# Altium PCB PCB1.PcbDoc
Units mil, origin at the board's own origin, x right, y up, seen from the top; angles counter-clockwise.
Board outline 6000 x 4000 mil, 2 copper layers (Top Layer, Bottom Layer); 40 components, 29 nets, 158 pads, 0 vias.
Unrouted connection lines stored in the file: 87.
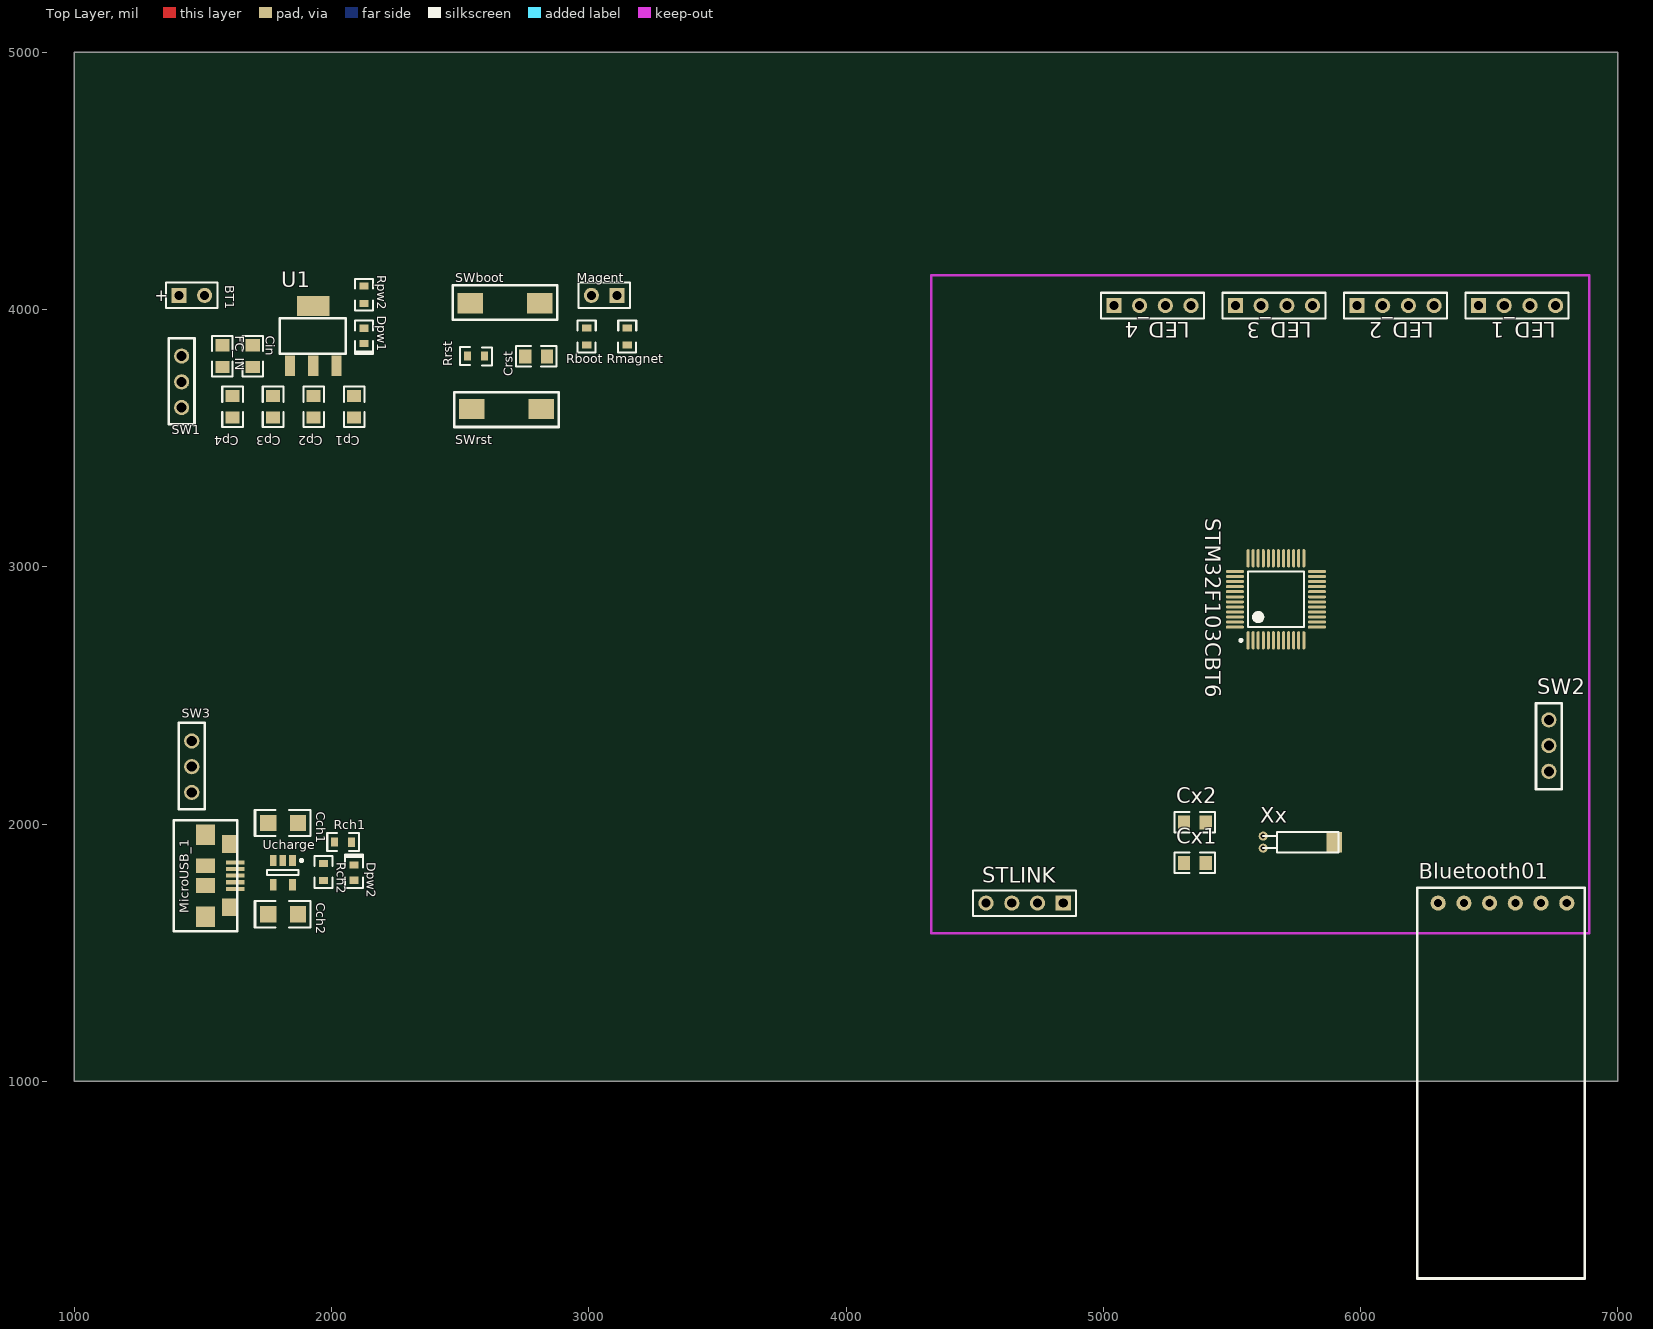
[diagram p0: Top Layer view]
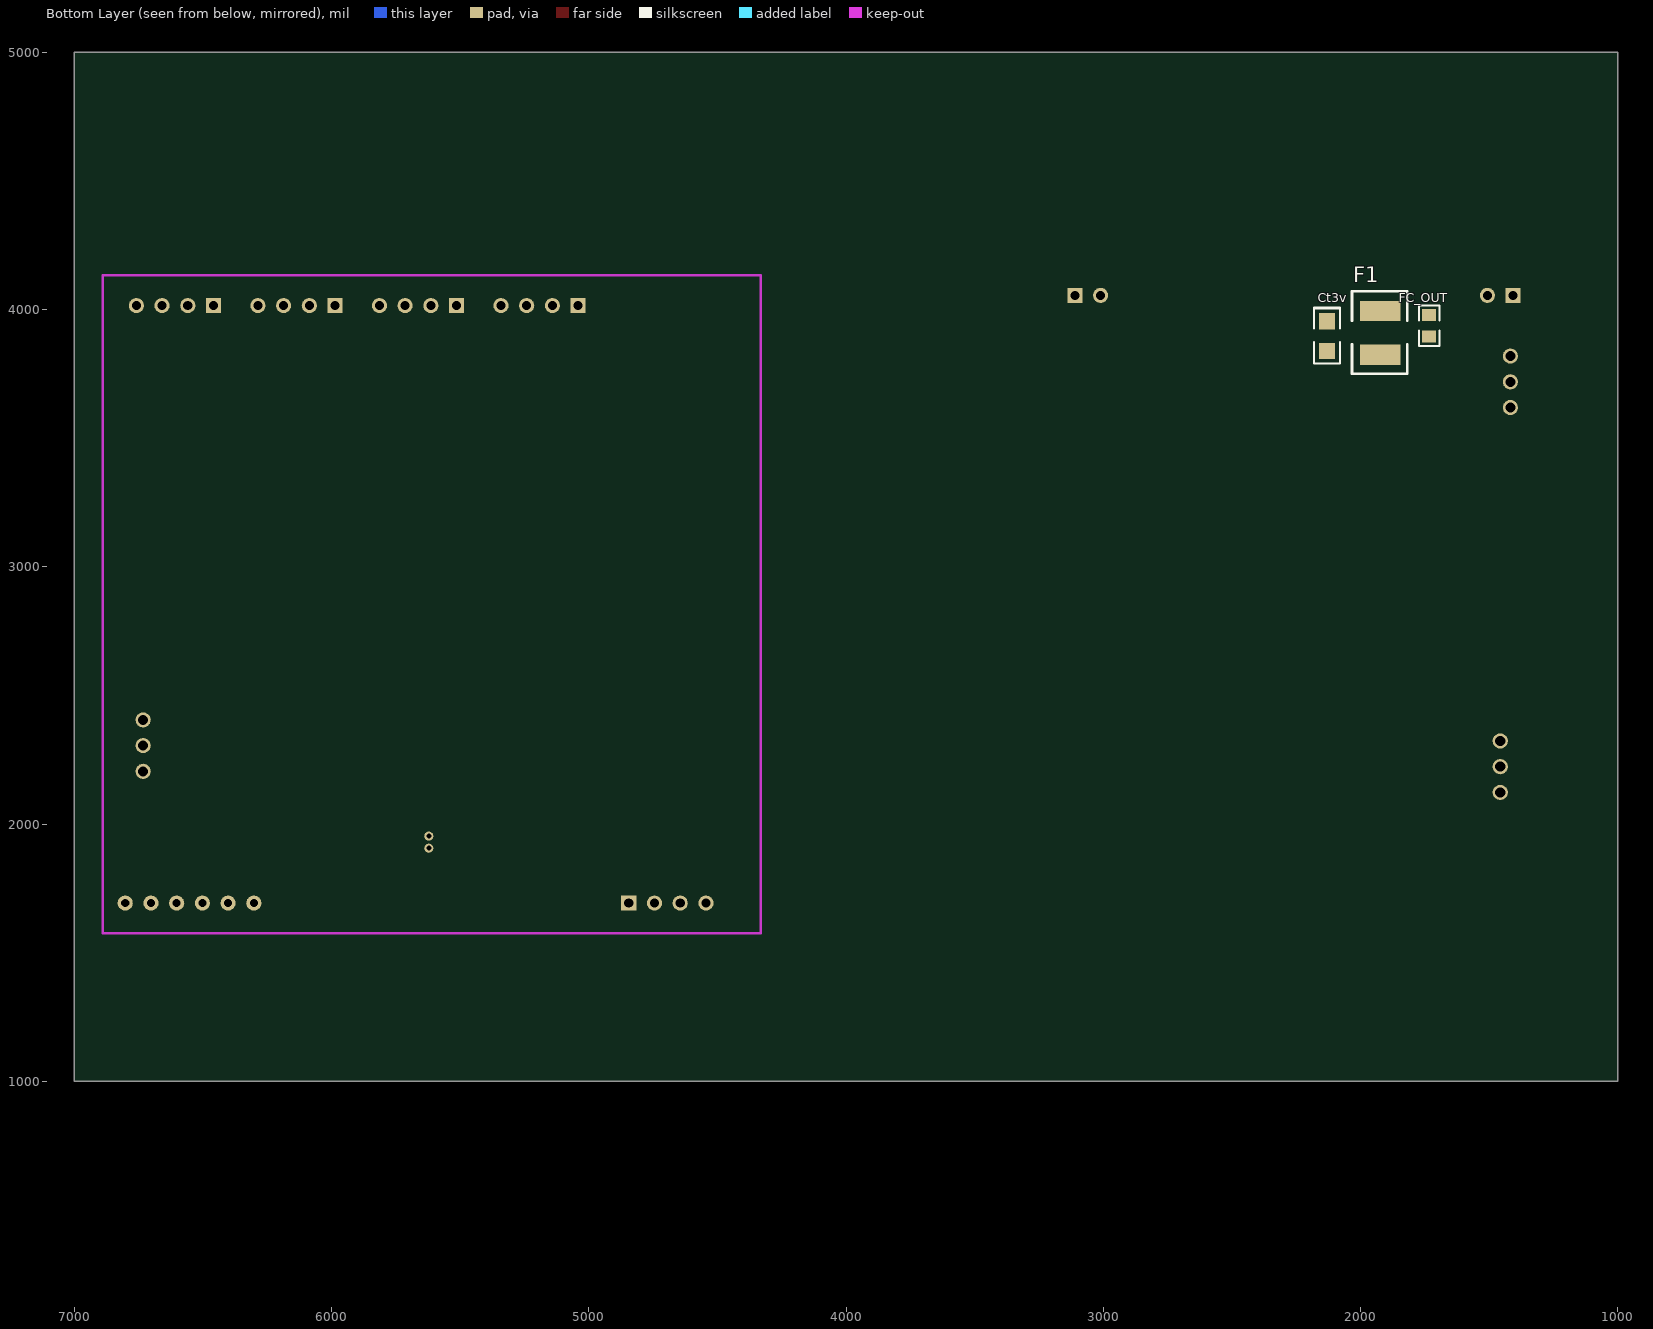
[diagram p1: Bottom Layer view, seen from below]

## Layer stack, top to bottom
Top Layer: signal copper 1.4
Dielectric: dielectric 12.6, FR-4, Dk 4.8
Bottom Layer: signal copper 1.4

## Board outline
1000,1000 7000,1000 7000,5000 1000,5000

## Design rules (kind name [scope] priority, off if disabled: settings)
Clearance [All] p1: gap=10
PolygonConnect [All] p1: connectstyle=Relief reliefconductorwidth=10 reliefentries=4 polygonreliefangle="90 Angle" airgapwidth=10
RoomDefinition LEDProject [InComponentClass('LEDProject')] p1: confinementstyle=ConfineIn formatcopy=TRUE lockcomponents=FALSE outline 1619.55,4924.44 13589.55,4924.44 13589.55,6564.44 1619.55,6564.44
RoutingVias [All] p1: holewidth=28 width=50 viastyle="Through Hole" minholewidth=28 minwidth=50 maxholewidth=28 maxwidth=50
SolderMaskExpansion [All] p1: expansion=4
Width [All] p1: maxlimit=10 minlimit=10 preferedwidth=10
28 further rules are at their usual default settings.

## Components (designator, comment, footprint, x,y, rotation, side; value= is the part's Value field where it differs from the comment)
Bluetooth01 "Bluetooth" "Bluetooth Module" 6813.08,1692.36 r180 top
BT1 "Battery" BAT-2 1456.69,4055.12 r0 top
Cch1 "CAP2" "Tantalum Cap Size A" 1811.02,2007.87 r90 top
Cch2 "CAP2" "Tantalum Cap Size A" 1811.02,1653.54 r90 top
Cin "CAP1" SMD-C-0805 1692.91,3818.9 r180 top
Cp1 "CAP1" SMD-C-0805 2086.61,3622.05 r180 top
Cp2 "CAP1" SMD-C-0805 1929.13,3622.05 r180 top
Cp3 "CAP1" SMD-C-0805 1771.65,3622.05 r180 top
Cp4 "CAP1" SMD-C-0805 1614.17,3622.05 r180 top
Crst "CAP1" SMD-C-0805 2795.28,3818.9 r90 top
Ct3v "CAP2" "Tantalum Cap Size A" 2125.98,3897.64 r180 bottom
Cx1 "CAP1" SMD-C-0805 5356.39,1849.84 r90 top
Cx2 "CAP1" SMD-C-0805 5356.39,2007.32 r90 top
Dpw1 "SMD LED" "SMT LED 0603" 2125.98,3897.64 r0 top
Dpw2 "SMD LED" "SMT LED 0603" 2086.61,1811.02 r180 top
F1 "fuse" FUSE_SMD 2007.87,3779.53 r90 bottom
FC_IN "CAP1" SMD-C-0805 1574.8,3818.9 r180 top
FC_OUT "CAP1" SMD-C-0805 1732.28,3937.01 r180 bottom
LED_1 "Header 4" HDR1X4 6458.75,4015.19 r0 top
LED_2 "Header 4" HDR1X4 5986.31,4015.19 r0 top
LED_3 "Header 4" HDR1X4 5513.87,4015.19 r0 top
LED_4 "Header 5" HDR1X4 5041.43,4015.19 r0 top
Magent "Header 2" HDR1X2 3110.24,4055.12 r180 top
MicroUSB_1 "MicroUSB" MicroUSB 1614.17,1850.39 r270 top
Rboot "Res" SMD-R-0603 2992.13,3897.64 r0 top
Rch1 "Res" SMD-R-0603 2047.24,1929.13 r270 top
Rch2 "Res" SMD-R-0603 1968.5,1811.02 r180 top
Rmagnet "Res" SMD-R-0603 3149.61,3897.64 r0 top
Rpw2 "Res" SMD-R-0603 2125.98,4055.12 r180 top
Rrst "Res" SMD-R-0603 2559.06,3818.9 r90 top
STLINK "Header 4" HDR1X4 4844.57,1692.36 r180 top
STM32F103CBT6 "STM32F10X-48" LQFP48_N 5671.35,2873.46 r90 top (schematic designator U?)
SW1 "3P Slide Switch" 3P_Smooth_Switch_90 1417.32,3818.9 r270 top
SW2 "3P Slide Switch" 3P_Smooth_Switch_90 6732.28,2204.72 r90 top
SW3 "3P Slide Switch" 3P_Smooth_Switch_90 1456.69,2322.83 r270 top
SWboot "SWrst" Button2_SMD 2559.06,4094.49 r0 top
SWrst "SWrst" Button2_SMD 2795.28,3543.31 r180 top
U1 "SPX3940" SOT-223 1929.13,3897.64 r0 top
Ucharge "MCP73831T" SOT23-5_N 1811.02,1811.02 r270 top
Xx "XTAL" CRYSTAL-2x6 5513.87,1967.95 r270 top

## Footprints (in the part's own frame and the unit in brackets; to place one, negate y for a bottom-side part, rotate by r counter-clockwise, add the part's x,y. Pads: shape width x height; smd on the part's side, far side on the other; paste and mask are expansions set on the pad)
3P_Smooth_Switch_90 [mm] "3P_Smooth_Switch_90"
  round 1.5 hole 1: 1(0,0) 2(2.54,0) 3(5.08,0)
  silkscreen extent -1.78,-1.27 6.73,1.27
BAT-2 [mm] "Battery; 2 Leads"
  rect 1.5x1.5 hole 0.9: 1(-1.27,0)
  round 1.5 hole 0.9: 2(1.27,0)
  silkscreen extent -2.54,-1.27 2.54,1.27
"Bluetooth Module" [mm] "Bluetooth Module"
  round 1.5 hole 0.8: 1(0.28,0) 2(2.82,0) 3(5.36,0) 4(7.9,0) 5(10.44,0) 6(12.98,0)
  silkscreen extent -1.48,-1.5 15.04,37.06, body extent 0.72,9.07 12.83,27.21, height 4.3
Button2_SMD [mm] "Button2_SMD"
  rect 2.5x2 smd: 0(-0.508,-1.778) 1(6.35,-1.778)
  silkscreen extent -2.24,-3.43 8.08,0, body extent -2.05,-3.55 8.15,-0.05, height 4.3
CRYSTAL-2x6 [mm] "CRYSTAL - 2mm x 6mm"
  round 0.9 hole 0.5: 1(1.575,2.743) 2(0.381,2.743)
  rect 2x1.524 smd: ""(0.989,9.775)
  silkscreen extent -0.03,2.74 2.01,10.17
FUSE_SMD [mil] "FUSE_SMD"
  rect 78.74x157.48 smd: 1(45,-84) 2(215,-85)
  silkscreen extent -30,-190 292,25, body extent 35,-154 221,-16, height 41
HDR1X2 [mm] "Connector; Header; 2 Position"
  rect 1.5x1.5 hole 0.9: 1(0,0)
  round 1.5 hole 0.9: 2(2.54,0)
  silkscreen extent -1.27,-1.27 3.81,1.27
HDR1X4 [mm] "Connector; Header; 4 Position"
  rect 1.5x1.5 hole 0.9: 1(0,0)
  round 1.5 hole 0.9: 2(2.54,0) 3(5.08,0) 4(7.62,0)
  silkscreen extent -1.27,-1.27 8.89,1.27
LQFP48_N [mm] "Thin QFP, 48-Leads, Body 7x7mm, Pitch 0.5mm, IPC Medium Density"
  oval 1.8x0.3 smd: 1(-4.05,2.75) 2(-4.05,2.25) 3(-4.05,1.75) 4(-4.05,1.25) 5(-4.05,0.75) 6(-4.05,0.25) 7(-4.05,-0.25) 8(-4.05,-0.75) 9(-4.05,-1.25) 10(-4.05,-1.75) 11(-4.05,-2.25) 12(-4.05,-2.75) 25(4.05,-2.75) 26(4.05,-2.25) 27(4.05,-1.75) 28(4.05,-1.25) 29(4.05,-0.75) 30(4.05,-0.25) 31(4.05,0.25) 32(4.05,0.75) 33(4.05,1.25) 34(4.05,1.75) 35(4.05,2.25) 36(4.05,2.75)
  oval 0.3x1.8 smd: 13(-2.75,-4.05) 14(-2.25,-4.05) 15(-1.75,-4.05) 16(-1.25,-4.05) 17(-0.75,-4.05) 18(-0.25,-4.05) 19(0.25,-4.05) 20(0.75,-4.05) 21(1.25,-4.05) 22(1.75,-4.05) 23(2.25,-4.05) 24(2.75,-4.05) 37(2.75,4.05) 38(2.25,4.05) 39(1.75,4.05) 40(1.25,4.05) 41(0.75,4.05) 42(0.25,4.05) 43(-0.25,4.05) 44(-0.75,4.05) 45(-1.25,4.05) 46(-1.75,4.05) 47(-2.25,4.05) 48(-2.75,4.05)
  silkscreen extent -4.17,-2.75 2.75,3.57, body extent -4.5,-4.5 4.5,4.5, height 1.5
MicroUSB [mm] "MicroUSB"
  rect 0.4x1.8 smd: 1(0,0.3) 2(0.65,0.3) 3(1.3,0.3) 4(1.95,0.3) 5(2.6,0.3)
  rect 2x1.9 smd: 6(-2.75,-2.65) 6(5.353,-2.65)
  rect 1.75x1.5 smd: 6(-1.825,-0.25) 6(4.425,-0.25)
  rect 1.45x1.9 smd: 6(0.325,-2.65) 6(2.275,-2.65)
  silkscreen extent -4.17,-5.8 6.8,0.5
SMD-C-0805 [mil] "Chip  , Body 2 x 1.2mm, IPC High Density"
  rect 55.12x47.24 smd: 1(-1,-42) 2(-1,42)
  silkscreen extent -41,-79 39,79, body extent -26,-40 24,38, height 39
SMD-R-0603 [mm] "Chip, Body 1.6x0.8mm, IPC High Density"
  rect 0.9x0.7 smd: 1(-0.005,-0.911) 2(0,0.787)
  silkscreen extent -0.91,-1.62 0.89,1.5, body extent -0.43,-0.72 0.42,0.83, height 0.45
"SMT LED 0603" [mm] "SMT LED; 2 Flat Leads"
  rect 0.9x0.7 smd: 1(0,0.75) 2(0,-0.75)
  silkscreen extent -0.89,-1.78 0.89,1.52, body extent -0.34,-0.91 0.38,0.74, height 0.68
SOT23-5_N [mm] "SOT23, 5-Leads, Body 2.9x1.6mm, Pitch 0.95mm, Lead Span 2.8mm, IPC Medium Density"
  rect 1.1x0.65 smd: 1(-1.2,0.95) 2(-1.2,0) 3(-1.2,-0.95) 4(1.2,-0.95) 5(1.2,0.95)
  silkscreen extent -1.32,-1.55 0.25,1.95, body extent -1.53,-1.53 1.47,1.47, height 1.3
SOT-223 [mm] "1A Low Dropout Voltage Regulator"
  rect 1x2 smd: 1(-2.3,-2.95) 2(0,-2.95) 3(2.3,-2.95)
  rect 3.2x2 smd: 4(0,2.95)
  silkscreen extent -3.3,-1.75 3.2,1.75
"Tantalum Cap Size A" [mil] "Tantalum Cap Size A"
  rect 62.99x62.99 smd: 1(-4,57) 2(-4,-59)
  silkscreen extent -55,-108 47,111, body extent -35,-67 28,67, height 69

## Part data
Bluetooth01: library part "Bluetooth Module", "Bluetooth Module"
BT1: "Multicell Battery"
Cch1 Cch2 Ct3v: "Electrolytic CAP"
Cin Cp1 Cp2 Cp3 Cp4 Crst Cx1 Cx2 FC_IN FC_OUT: "Capacitor_SMD"
Dpw1 Dpw2: "Typical RED GaAs LED"
LED_1 LED_2 LED_3 STLINK: "Header, 4-Pin"
LED_4: library part "Header 4", "Header, 4-Pin"
Magent: "Header, 2-Pin"
Rboot Rch1 Rch2 Rmagnet Rpw2 Rrst: "Resistor"
STM32F103CBT6: "STM32 ARM-based 32-bit MCU , 48-pin LQFP, Industrial Temperature"
SW1 SW2 SW3: "3Pin Slide Switch"
SWboot SWrst: library part Button2_SMD, "Button2_SMD"
U1: "1A Low Dropout Voltage Regulator"

## Nets (pads, with @x,y where several pads share a name; then routed paths per layer and width w, separated by ;. In a path a pad name is that pad's centre, name@x,y a point inside that pad or via, vN(x,y) a via of type N, cw(c..) or ccw(c..) an arc to the next point about the centre after c; other vN are vias at no path point)
3V3M: Bluetooth01.2 Cp1.2 Cp2.2 Cp3.2 Cp4.2 Ct3v.1 F1.2 FC_OUT.2 Magent.1 Rpw2.1 Rrst.2 STLINK.4 STM32F103CBT6.9 STM32F103CBT6.24 STM32F103CBT6.36 STM32F103CBT6.48 SW2.2 SWboot.0
5V: Cin.2 FC_IN.2 LED_1.2 LED_2.2 LED_3.2 LED_4.2 SW1.1 U1.1
BOOT0: Rboot.2 STM32F103CBT6.44 SWboot.1
CHARGE: SW1.3 SW3.2
GND: Bluetooth01.1 BT1.2 Cch1.2 Cch2.2 Cin.1 Cp1.1 Cp2.1 Cp3.1 Cp4.1 Crst.2 Ct3v.2 Cx1.2 Cx2.2 Dpw1.2 FC_IN.1 FC_OUT.1 LED_1.1 LED_2.1 LED_3.1 LED_4.1 MicroUSB_1.5 Rboot.1 Rch2.1 Rmagnet.1 STLINK.3 STM32F103CBT6.8 STM32F103CBT6.23 STM32F103CBT6.35 STM32F103CBT6.47 SWrst.1 U1.2 U1.4 Ucharge.2
MAGNETSW: Magent.2 Rmagnet.2 STM32F103CBT6.32
NetBT1_1: BT1.1 SW1.2
NetCch1_1: Cch1.1 SW3.3 Ucharge.3
NetCch2_1: Cch2.1 Dpw2.1 MicroUSB_1.1 Ucharge.4
NetDpw1_1: Dpw1.1 Rpw2.2
NetDpw2_2: Dpw2.2 Rch1.2
NetF1_1: F1.1 U1.3
NetRch1_1: Rch1.1 Ucharge.1
NetRch2_2: Rch2.2 Ucharge.5
RESET#: Crst.1 Rrst.1 STM32F103CBT6.7 SWrst.0
SCL_1: LED_1.3 STM32F103CBT6.19
SCL_2: LED_2.3 STM32F103CBT6.26
SCL_3: LED_3.3 STM32F103CBT6.28
SCL_4: LED_4.3 STM32F103CBT6.46
SDA_1: LED_1.4 STM32F103CBT6.18
SDA_2: LED_2.4 STM32F103CBT6.25
SDA_3: LED_3.4 STM32F103CBT6.27
SDA_4: LED_4.4 STM32F103CBT6.45
SWCLK: STM32F103CBT6.37
SWDAT: STM32F103CBT6.34
UART2_RX: STM32F103CBT6.13
UART2_TX: STM32F103CBT6.12
X1: Cx1.1 STM32F103CBT6.5 Xx.1
X2: Cx2.1 STM32F103CBT6.6 Xx.2
pads on no net: Bluetooth01.3 Bluetooth01.4 Bluetooth01.5 Bluetooth01.6 MicroUSB_1.2 MicroUSB_1.3 MicroUSB_1.4 MicroUSB_1.6 STLINK.1 STLINK.2 STM32F103CBT6.1 STM32F103CBT6.2 STM32F103CBT6.3 STM32F103CBT6.4 STM32F103CBT6.10 STM32F103CBT6.11 STM32F103CBT6.14 STM32F103CBT6.15 STM32F103CBT6.16 STM32F103CBT6.17 STM32F103CBT6.20 STM32F103CBT6.21 STM32F103CBT6.22 STM32F103CBT6.29 STM32F103CBT6.30 STM32F103CBT6.31 STM32F103CBT6.33 STM32F103CBT6.38 STM32F103CBT6.39 STM32F103CBT6.40 STM32F103CBT6.41 STM32F103CBT6.42 STM32F103CBT6.43 SW2.1 SW2.3 SW3.1 Xx.

## Keep-outs
Keep-Out Layer:
  lines w10: 4330.71,1574.8 4330.71,4133.86 6889.76,4133.86 6889.76,1574.8 4330.71,1574.8

## Text inside footprints (layer, text, board x,y; h text height)
BT1: Top Overlay "+" at 1312.2,4032.4 h45.28